# Altium PCB LED_PCB.PcbDoc
Units mil, origin at the board's own origin, x right, y up, seen from the top; angles counter-clockwise.
Board outline 1045 x 690 mil, 2 copper layers (Top Layer, Bottom Layer); 10 components, 10 nets, 25 pads, 2 vias.
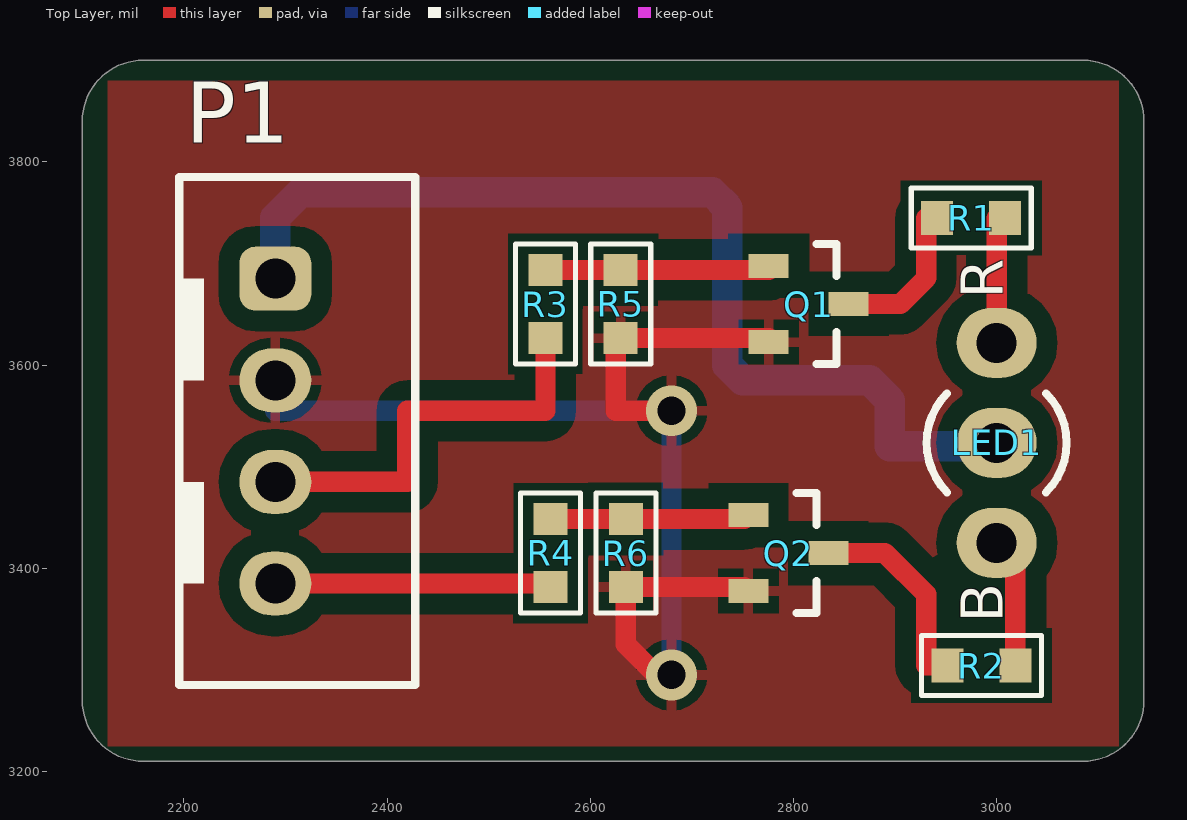
[diagram p0: Top Layer view]
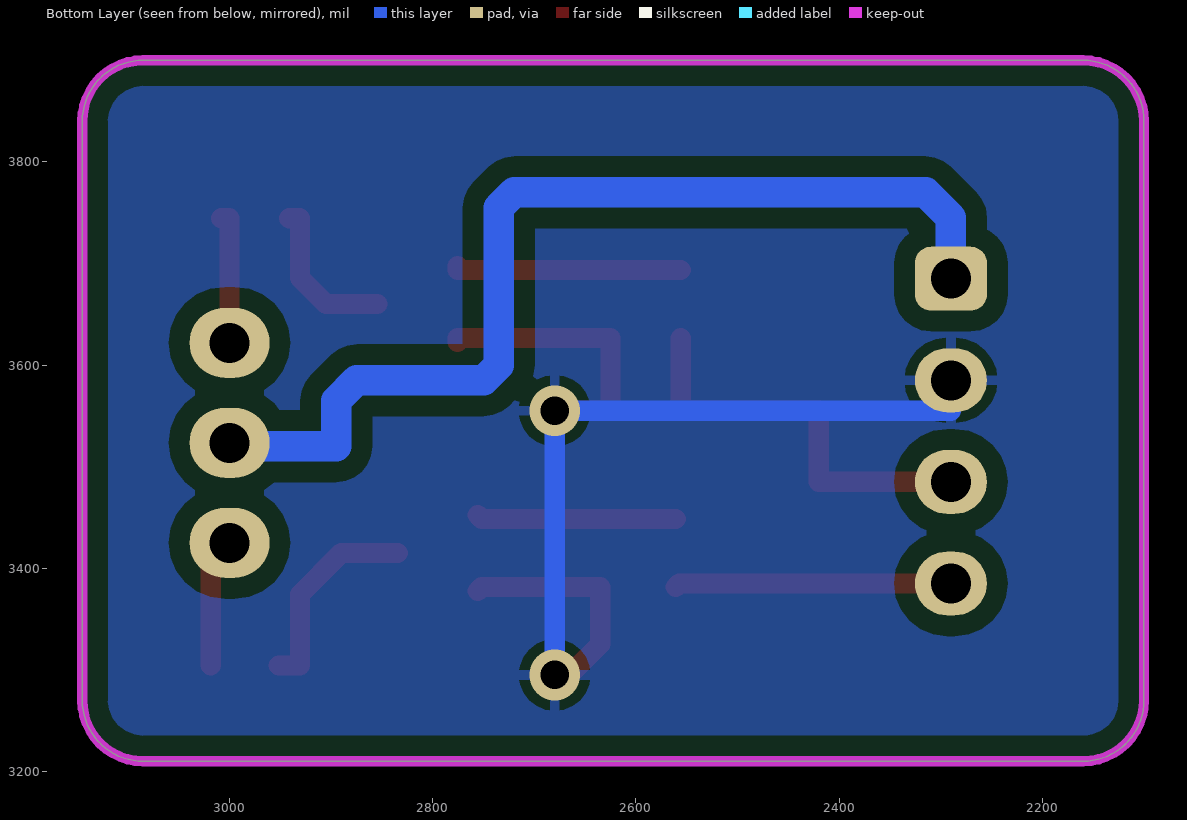
[diagram p1: Bottom Layer view, seen from below]
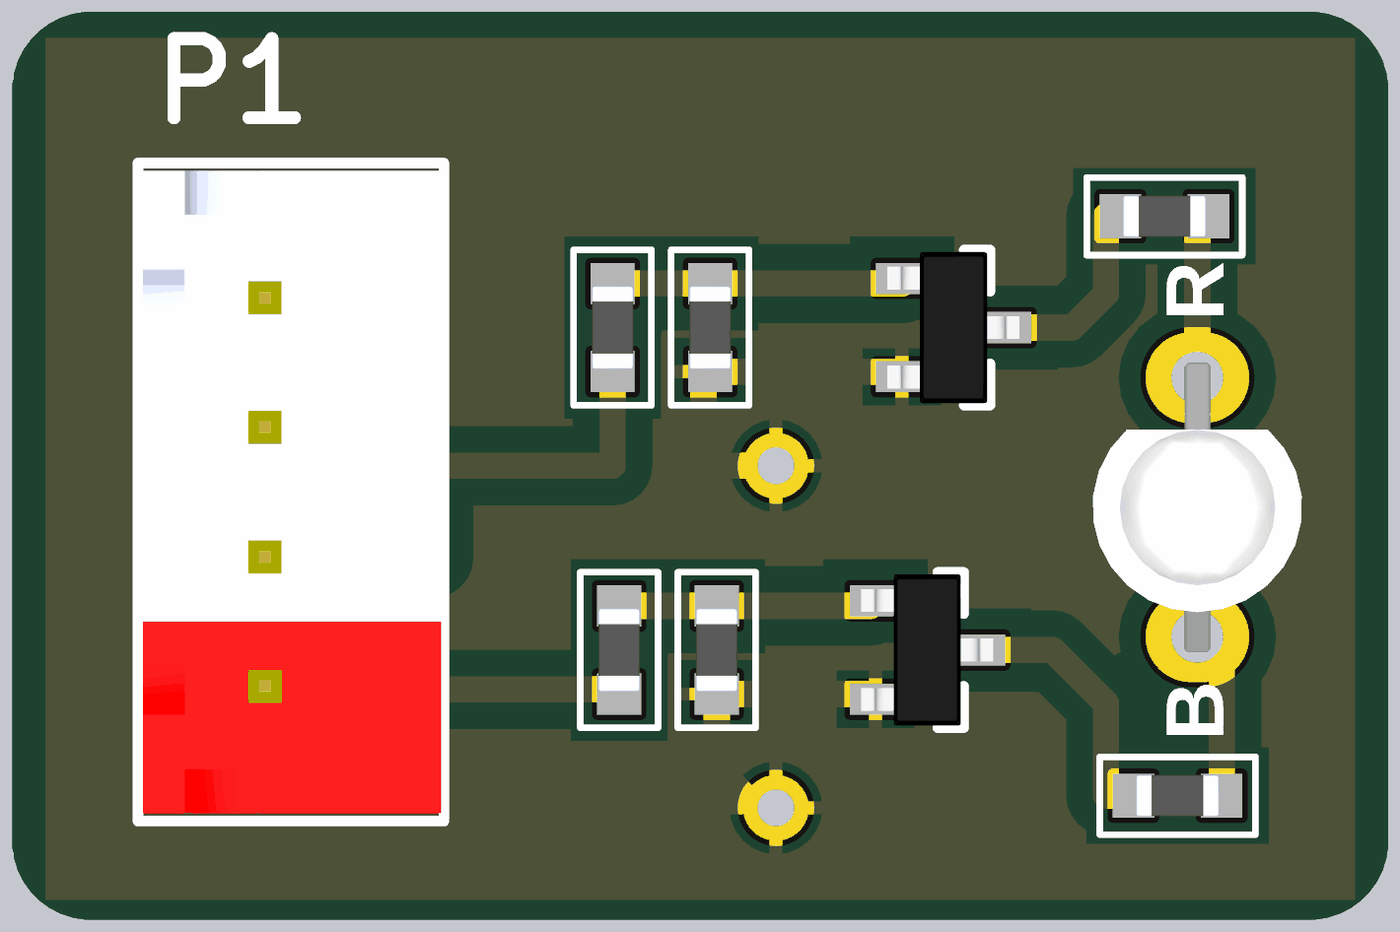
[diagram p2: 3D render of the assembled board from above, using the file's embedded part models]

## Layer stack, top to bottom
Top Solder: solder mask 0.4, Solder Resist, Dk 3.5
Top Layer: signal copper 1.4
Dielectric 1: dielectric 12.6, FR-4, Dk 4.8
Bottom Layer: signal copper 1.4
Bottom Solder: solder mask 0.4, Solder Resist, Dk 3.5

## Board outline
2100,3270 2100,3840 cw(c2160,3840) 2160,3900 3085,3900 cw(c3085,3840) 3145,3840 3145,3270 cw(c3085,3270) 3085,3210 2160,3210 cw(c2160,3270)

## Design rules (kind name [scope] priority, off if disabled: settings)
Clearance [All] p1: gap=20 ignorepadtopadclearanceinfootprint=FALSE
PolygonConnect [All] p1: connectstyle=Relief reliefconductorwidth=10 reliefentries=4 polygonreliefangle="90 Angle" airgapwidth=10
RoutingVias [All] p1: holewidth=28 width=50 viastyle="Through Hole" minholewidth=28 minwidth=50 maxholewidth=28 maxwidth=50
SolderMaskExpansion [All] p1: expansion=4
Width [All] p1: maxlimit=100 minlimit=10 preferedwidth=20
30 further rules are at their usual default settings.

## Components (designator, comment, footprint, x,y, rotation, side; value= is the part's Value field where it differs from the comment)
LED1 "RB LED" LED-BICOLOR-3MM 3000,3621.89 r0 top
P1 "Header 4" HDR/Header/4/BOX/RED 2290,3535 r270 top
Q1 "C1815" SOT-23 2815,3660 r0 top
Q2 "C1815" SOT-23 2795,3415 r0 top
R1 "1K" "R 0603" 2975,3744.57 r0 top
R2 "330" "R 0603" 2985,3304.26 r0 top
R3 "4.7k" "R 0603" 2555.93,3660 r270 top
R4 "4.7k" "R 0603" 2560.93,3415 r270 top
R5 "47k" "R 0603" 2630,3660 r270 top
R6 "47k" "R 0603" 2635,3415 r90 top

## Footprints (in the part's own frame and the unit in brackets; to place one, negate y for a bottom-side part, rotate by r counter-clockwise, add the part's x,y. Pads: shape width x height; smd on the part's side, far side on the other; paste and mask are expansions set on the pad)
HDR/Header/4/BOX/RED [mm]
  rrect50% 1.6x1.8 hole 1: 1(-3.81,0)
  oval 1.6x1.8 hole 1: 2(-1.27,0) 3(1.27,0) 4(3.81,0)
  silkscreen extent -6.35,-2.41 6.35,3.5, body extent -6.2,-2.3 6.2,3.45, height 7
LED-BICOLOR-3MM [mm] "Diode, Axial; Body 5.2 x 2.7 mm (LxDia. max), Lead Dia. 0.86 mm (max)"
  oval 2x1.75 hole 1: 1(0,0) 2(0,-2.5) 3(0,-5)
  silkscreen extent -1.75,-3.74 1.75,-1.26, body extent -2.02,-5.29 2.02,0.29, height 6.76
"R 0603" [mm] "Chip Resistor, 2-Leads, Body 1.6x0.8mm, IPC Medium Density"
  rect 0.8x0.85 smd: 1(-0.85,0) 2(0.85,0)
  silkscreen extent -1.5,-0.75 1.5,0.75, body extent -0.8,-0.4 0.8,0.4, height 0.5
SOT-23 [mm] "SOT23, 3-Leads, Body 3.0x2.5mm (max), Pitch 0.95mm, IPC Medium Density"
  rect 1x0.6 smd: 1(-1,0.95) 2(-1,-0.95) 3(1,0)
  silkscreen extent 0.2,-1.5 0.7,1.5, body extent -1.28,-1.46 1.27,1.46, height 0.95

## Part data
LED1: library part "LED 2-color-A", "Bicolor RB 3mm LED"
P1: "Header, 4-Pin"
Q1 Q2: library part "Transistor NPN", "NPN Bipolar Transistor"
R1 R2 R3 R4 R5 R6: library part Resistor, "Resistor"

## Via types
v1: diameter 50, hole 28, Top Layer to Bottom Layer, 2 vias

## Nets (pads, with @x,y where several pads share a name; then routed paths per layer and width w, separated by ;. In a path a pad name is that pad's centre, name@x,y a point inside that pad or via, vN(x,y) a via of type N, cw(c..) or ccw(c..) an arc to the next point about the centre after c; other vN are vias at no path point)
GND: P1.2 Q1.2 Q2.2 R5.2 R6.1 | length 1197.3
  Top Layer w20: v1(2680,3295) 2665,3295 2635,3325 R6.1 2751.69,3381.54 Q2.2 ; v1(2680,3555) 2625,3555 2625,3626.54 R5.2 2775.63,3626.54 Q1.2
  Bottom Layer w20: P1.2 2290,3555 v1(2680,3555) v1(2680,3295)
LED1: P1.3 R3.2 | length 407.5
  Top Layer w20: P1.3 2420,3485 2420,3555 2555.93,3555 R3.2
LED2: P1.4 R4.2 | length 272.4
  Top Layer w20: P1.4 2557.47,3385 R4.2
NetLED1_1: LED1.1 R1.2 | length 139.6
  Top Layer w20: LED1.1@3000,3601.89 LED1.1@3008.46,3601.89 ; LED1.1 3000,3744.57 R1.2
NetLED1_3: LED1.3 R2.2 | length 139.2
  Top Layer w20: LED1.3 3018.46,3425.04 R2.2
NetQ1_1: Q1.1 R3.1 R5.1 | length 223.6
  Top Layer w20: R3.1 R5.1 2775.63,3693.46 Q1.1
NetQ1_3: Q1.3 R1.1 | length 156.7
  Top Layer w20: Q1.3 2905,3660 2930.63,3685.63 2930.63,3744.57 R1.1
NetQ2_1: Q2.1 R4.1 R6.2 | length 196.3
  Top Layer w20: R4.1 R6.2 2751.69,3448.46 Q2.1
NetQ2_3: Q2.3 R2.1 | length 204.1
  Top Layer w20: Q2.3 2890,3415 2930.63,3374.37 2930.63,3304.26 R2.1
VCC: LED1.2 P1.1 | length 1004.6
  Bottom Layer w30: P1.1 2290,3745 2315,3770 2720,3770 2735,3755 2735,3599.85 2749.85,3585 2875,3585 2895,3565 2895,3520 3000,3520 LED1.2

## Polygon pours and split planes (outlines as drawn)
GND on Bottom Layer (solid, remove dead copper, pour order 6): 2080,3910 3160,3910 3160,3200 2080,3200
GND on Top Layer (solid, remove dead copper, pour order 10): 2125,3880 3120,3880 3120,3225 2125,3225

## Keep-outs
Bottom Layer:
  the board outline again, w10

## Text inside footprints (layer, text, board x,y; h text height)
LED1: Top Overlay "B" at 3019.68,3346.3 h70.87 r90; Top Overlay "R" at 3019.68,3665.2 h70.87 r90